# Altium PCB Rcon01.PcbDoc
Units mil, origin at the board's own origin, x right, y up, seen from the top; angles counter-clockwise.
Board outline 4724.41 x 1181.1 mil, 2 copper layers (Top Layer, Bottom Layer); 12 components, 22 nets, 92 pads, 2 vias.
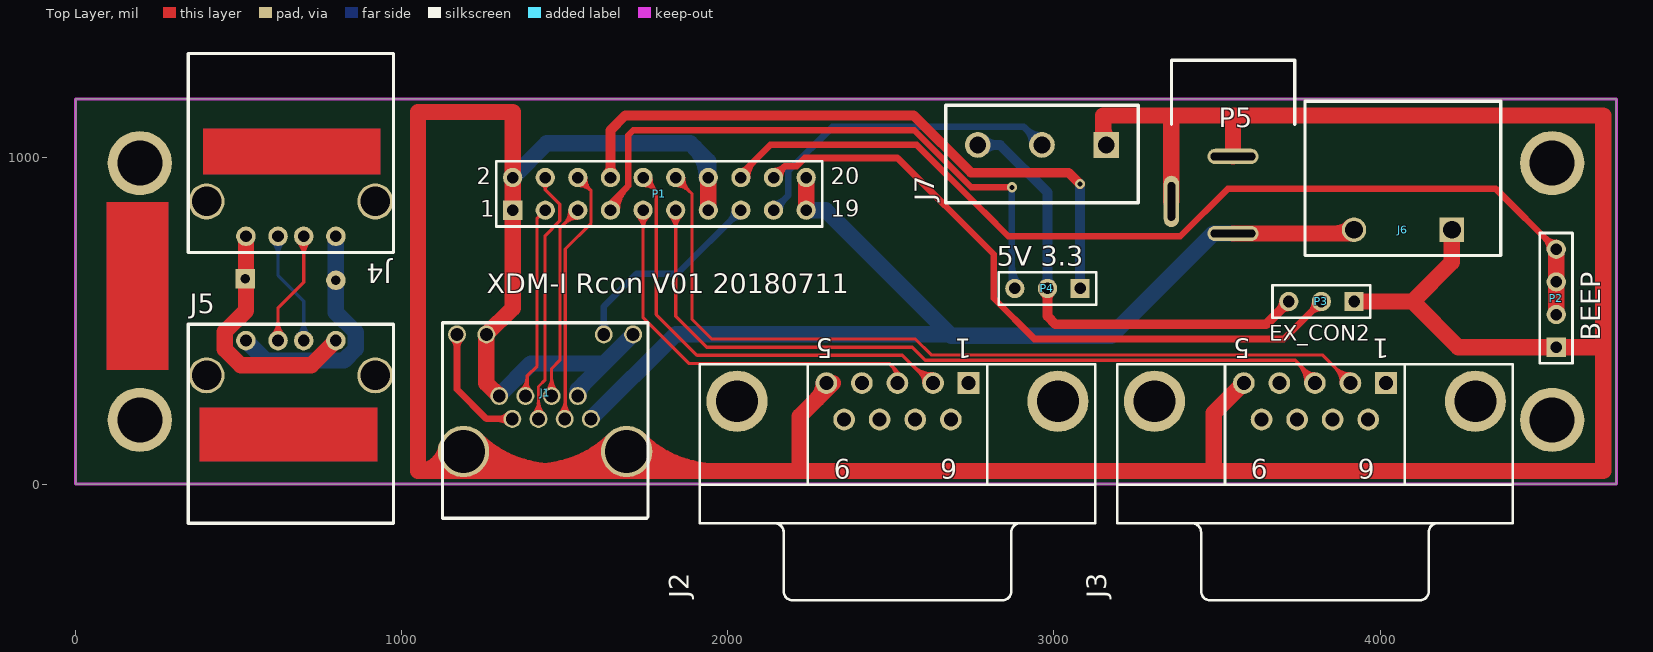
[diagram p0: Top Layer view]
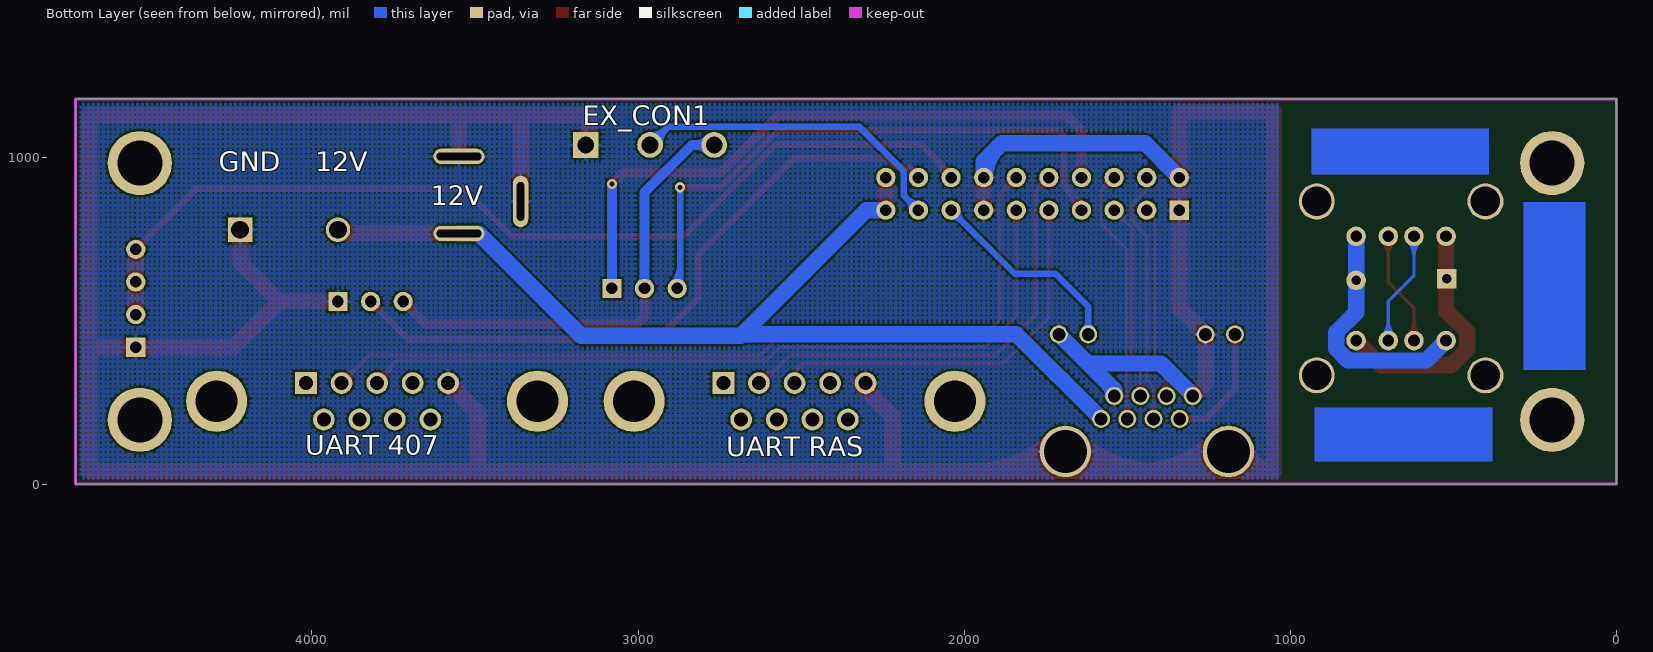
[diagram p1: Bottom Layer view, seen from below]

## Layer stack, top to bottom
Top Layer: signal copper 1.4
Dielectric: dielectric 12.6, FR-4, Dk 4.8
Bottom Layer: signal copper 1.4

## Board outline
0,0 0,1181.1 4724.41,1181.1 4724.41,0

## Design rules (kind name [scope] priority, off if disabled: settings)
Clearance [All] p1: gap=6
Height [All] p1 off: minheight=0 maxheight=1000 prefheight=500
HoleSize [All] p1: absolutevalues=TRUE maxlimit=236.22 minlimit=11.81 maxpercent=80.000 minpercent=20.000
PolygonConnect [All] p1: connectstyle=Relief reliefconductorwidth=10 reliefentries=4 polygonreliefangle="90 Angle"
RoutingVias [All] p1: holewidth=28 width=50 viastyle="Through Hole" minholewidth=11.81 minwidth=23.62 maxholewidth=28 maxwidth=50
SilkscreenOverComponentPads [All] p1: minsilkscreentomaskgap=10
SolderMaskExpansion [All] p1: expansion=4
Width Width_GND [InNet('GND')] p1: maxlimit=50 minlimit=20 preferedwidth=50
Width [All] p2: maxlimit=50 minlimit=10 preferedwidth=10
25 further rules are at their usual default settings.

## Components (designator, comment, footprint, x,y, rotation, side; value= is the part's Value field where it differs from the comment)
J1 "RJ45" RJ45_1 1580,200 r0 top locked
J2 "D Connector 9" DSUB1.385-2H9 2520,-120 r180 top locked
J3 "D Connector 9" DSUB1.385-2H9 3800,-120 r180 top locked
J4 "USB-A" USB-A 660,760 r180 top locked
J5 "USB-A" USB-A 660,440 r0 top locked
J6 "XK7.62-2P" XK7.62-2P 4220,780 r270 top locked
J7 "KF301-3P" KF301-3P 3160,1040 r180 top locked
P1 "Header 10X2" HDR2X10 1340,840 r0 top locked
P2 "Header 4" HDR1X4 4540,420 r90 top
P3 "Header 3" HDR1X3 3920,560 r180 top
P4 "Header 3" HDR1X3 3080,600 r180 top
P5 "Header 3" DC005 3360,1300 r270 top

## Footprints (in the part's own frame and the unit in brackets; to place one, negate y for a bottom-side part, rotate by r counter-clockwise, add the part's x,y. Pads: shape width x height; smd on the part's side, far side on the other; paste and mask are expansions set on the pad)
DC005 [mm]
  oval 1.2x4 hole 0.6 slot 3.5 at 90 deg: 1(13.5,4.8) 3(7.5,4.8)
  oval 4x1.2 hole 0.6 slot 3 at 0 deg: 2(11,0)
  silkscreen extent 0,0 5,9.6
DSUB1.385-2H9 [mm] "Connector; D Subminiature; 9 Position; Right Angle; Pitch 1.385 mm"
  rect 1.69x1.69 hole 1.09: 1(-5.54,-10.92)
  round 1.69 hole 1.09: 2(-2.77,-10.92) 3(0,-10.92) 4(2.77,-10.92) 5(5.54,-10.92) 6(-4.155,-8.08) 7(-1.385,-8.08) 8(1.385,-8.08) 9(4.155,-8.08)
  round 4.76 hole 3.26: 10(-12.495,-9.5) 11(12.495,-9.5)
  silkscreen extent -15.4,-12.4 15.4,6
HDR1X3 [mm] "Connector; Header; 3 Position"
  rect 1.5x1.5 hole 0.9: 1(0,0)
  round 1.5 hole 0.9: 2(2.54,0) 3(5.08,0)
  silkscreen extent -1.27,-1.27 6.35,1.27
HDR1X4 [mm] "Connector; Header; 4 Position"
  rect 1.5x1.5 hole 0.9: 1(0,0)
  round 1.5 hole 0.9: 2(2.54,0) 3(5.08,0) 4(7.62,0)
  silkscreen extent -1.27,-1.27 8.89,1.27
HDR2X10 [mm] "Connector; Header; 10x2 Position"
  rect 1.5x1.5 hole 0.9: 1(0,0)
  round 1.5 hole 0.9: 2(0,2.54) 3(2.54,0) 4(2.54,2.54) 5(5.08,0) 6(5.08,2.54) 7(7.62,0) 8(7.62,2.54) 9(10.16,0) 10(10.16,2.54) 11(12.7,0) 12(12.7,2.54) 13(15.24,0) 14(15.24,2.54) 15(17.78,0) 16(17.78,2.54) 17(20.32,0) 18(20.32,2.54) 19(22.86,0) 20(22.86,2.54)
  silkscreen extent -1.27,-1.27 24.13,3.81
KF301-3P [mm]
  rect 2x2 hole 1.3: 1(0,0)
  round 2 hole 1.3: 2(5,0) 3(10,0)
  silkscreen extent -2.5,-3.1 12.5,4.5
RJ45_1 [mm]
  round 1.4 hole 1: 1(0,0) 2(-1.02,1.78) 3(-2.04,0) 4(-3.06,1.78) 5(-4.08,0) 6(-5.1,1.78) 7(-6.12,0) 8(-7.14,1.78) 9(3.29,6.58) 10(1,6.58) 11(-8.14,6.58) 12(-10.43,6.58)
  round 4 hole 3.35: 13(2.78,-2.54) 14(-9.92,-2.54)
  silkscreen extent -11.56,-7.75 4.44,7.49
USB-A [mm]
  round 1.524 hole 0.92: 1(-3.5,0) 2(-1,0) 3(1,0) 4(3.5,0)
  round 2.8 hole 2.3: 5(-6.57,-2.71) 6(6.57,-2.71)
  silkscreen extent -8,-14.22 8,1.27
XK7.62-2P [mm]
  rect 1.9x1.9 hole 1.4: 1(0,0)
  round 1.9 hole 1.4: 2(0,-7.62)
  silkscreen extent -10,-11.43 2,3.81

## Part data
J1: library part RJ45_1
J2 J3: "Receptacle Assembly, 9 Position, Right Angle"
J4 J5: "USB-A female"
P1: "Header, 10-Pin, Dual row"
P2: "Header, 4-Pin"
P3 P4 P5: "Header, 3-Pin"

## Free pads (board coordinates)
  round 196.85 hole 137.8: 7(196.85,196.85) 8(196.85,984.25) 9(4527.56,196.85) 10(4527.56,984.25)
  rect 60x60 hole 30: 11(520,630)
  round 60 hole 30: 12(797.8,625)

## Via types
v1: diameter 31.5, hole 15.75, Top Layer to Bottom Layer, 2 vias

## Nets (pads, with @x,y where several pads share a name; then routed paths per layer and width w, separated by ;. In a path a pad name is that pad's centre, name@x,y a point inside that pad or via, vN(x,y) a via of type N, cw(c..) or ccw(c..) an arc to the next point about the centre after c; other vN are vias at no path point)
BEEP: P1.16 P2.2 P2.3 P2.4 | length 3295.6
  Top Layer w20: P1.16 2040,950 2130,1040 2579.39,1040 2784.39,835 ; 2785,835 2860,760 3387.43,760 3532.43,905 4355,905 P2.4 ; 4506.66,753.34 ccw(c4540,786.67) 4540,739.53 cw(c4540,786.67) 4506.66,753.34 ; 4506.66,753.34 cw(c4473.33,720) 4520.47,720 ccw(c4473.33,720) 4506.66,753.34 ; P1.16@2040,959.53 ccw(c2040,982.53) 2056.26,966.26 cw(c2040,982.53) P1.16@2040,959.53 ; P1.16@2059.53,940 cw(c2130.81,940) 2080.41,990.41 ccw(c2130.81,940) P1.16@2059.53,940
  Top Layer w50: P2.2 P2.3 P2.4
CON1_N: J1.4 P1.5 | length 1165.8
  Top Layer w10: J1.4 1459.53,354.53 1485,380 1485,785 P1.5 ; 1459.53,300.4 ccw(c1489.85,300.4) 1468.41,278.96 cw(c1489.85,300.4) 1459.53,300.4 ; 1459.53,300.4 cw(c1429.21,300.4) 1450.65,278.96 ccw(c1429.21,300.4) 1459.53,300.4 ; 1459.53,324.54 ccw(c1513.99,324.54) 1475.48,286.03 cw(c1513.99,324.54) 1459.53,324.54 ; 1459.53,324.54 cw(c1405.07,324.54) 1443.58,286.03 ccw(c1405.07,324.54) 1459.53,324.54 ; 1498.13,798.13 ccw(c1456.26,840) 1515.47,840 cw(c1456.26,840) 1498.13,798.13 ; 1498.13,798.13 cw(c1540,756.26) 1540,815.47 ccw(c1540,756.26) 1498.13,798.13 ; 1515.2,815.2 ccw(c1490.4,840) 1525.47,840 cw(c1490.4,840) 1515.2,815.2 ; 1515.2,815.2 cw(c1540,790.4) 1540,825.47 ccw(c1540,790.4) 1515.2,815.2
CON1_P: J1.3 P1.6 | length 1297.8
  Top Layer w10: J1.3 1501,201.31 1501,721 1580.53,800.53 1580.53,899.47 ; P1.6 1580.53,899.47 ; 1564,916 ccw(c1541.1,893.09) 1540.34,925.48 cw(c1541.1,893.09) 1564,916 ; 1564,916 cw(c1586.91,938.9) 1554.52,939.66 ccw(c1586.91,938.9) 1564,916 ; 1580.53,899.47 ccw(c1541.85,860.8) 1540.57,915.48 cw(c1541.85,860.8) 1580.53,899.47 ; 1580.53,899.47 cw(c1619.2,938.15) 1564.52,939.43 ccw(c1619.2,938.15) 1580.53,899.47 ; J1.3@1483.73,215.95 ccw(c1442.05,257.63) 1501,257.63 cw(c1442.05,257.63) J1.3@1483.73,215.95 ; J1.3@1490.81,208.88 ccw(c1466.19,233.49) 1501,233.49 cw(c1466.19,233.49) J1.3@1490.81,208.88 ; 1501,251.29 ccw(c1550.98,251.29) 1515.64,215.95 cw(c1550.98,251.29) 1501,251.29
CON2_N: J1.6 P1.3 | length 820.7
  Top Layer w10: J1.6 1385,275.87 1385,332 ; P1.3 1415,815 1415,362 1385,332 ; 1385,332 cw(c1325.76,332) 1364.47,287.15 ccw(c1325.76,332) 1385,332 ; J1.6@1371.01,279.58 ccw(c1344.62,310.15) 1385,310.15 cw(c1344.62,310.15) J1.6@1371.01,279.58 ; 1385,310.57 ccw(c1419.7,310.57) 1395.16,286.03 cw(c1419.7,310.57) 1385,310.57
CON2_P: J1.5 P1.4 | length 1125.2
  Top Layer w10: J1.5 1419.37,299.37 1439.53,319.53 1439.53,762.16 1484.53,807.16 1484.53,858.44 1440,902.97 ; P1.4 1440,902.97 ; 1419.37,230.32 ccw(c1449.69,230.32) 1428.25,208.88 cw(c1449.69,230.32) 1419.37,230.32 ; 1419.37,230.32 cw(c1389.05,230.32) 1410.49,208.88 ccw(c1389.05,230.32) 1419.37,230.32 ; 1419.37,254.46 ccw(c1473.83,254.46) 1435.32,215.95 cw(c1473.83,254.46) 1419.37,254.46 ; 1419.37,254.46 cw(c1364.91,254.46) 1403.42,215.95 ccw(c1364.91,254.46) 1419.37,254.46 ; 1440,902.97 ccw(c1424.32,902.97) 1430.43,917.42 cw(c1424.32,902.97) 1440,902.97 ; 1440,902.97 cw(c1455.68,902.97) 1449.57,917.42 ccw(c1455.68,902.97) 1440,902.97
EX_CON1: J7.2 P1.17 | length 1181.6
  Bottom Layer w20: P1.17 2185.53,885.53 2185.53,959.39 2185,959.91 2320.46,1095.37 2907.78,1095.37 J7.2 ; P1.17@2140,859.53 ccw(c2140,906.67) 2173.34,873.34 ccw(c2206.67,840) P1.17@2159.53,840 ; J7.2@2933.78,1040 ccw(c2862.87,1040) 2913.01,1090.14 ccw(c2963.15,1140.28) J7.2@2963.15,1069.37
EX_CON2: P1.18 P3.2 | length 2357.7
  Top Layer w20: P1.18 2175,975 2210.61,975 2235.61,1000 2520,1000 2815,705 2815,570 2940,445 3705,445 P3.2 ; 2173.34,973.34 ccw(c2206.67,940) 2159.53,940 cw(c2206.67,940) 2173.34,973.34 ; 2173.34,973.34 cw(c2140,1006.67) 2140,959.53 ccw(c2140,1006.67) 2173.34,973.34 ; 3786.66,526.66 ccw(c3753.33,560) 3800.47,560 cw(c3753.33,560) 3786.66,526.66 ; 3786.66,526.66 cw(c3820,493.33) 3820,540.47 ccw(c3820,493.33) 3786.66,526.66
GND: J1.2 J1.8 J1.9 J1.11 J1.13 J1.14 J2.5 J3.5 J6.1 J7.1 P1.1 P1.2 P1.13 P1.14 P2.1 P3.1 P5.2 P5.3 | length 15794
  Top Layer w50: 1050,44.92 1050,1141.18 1340,1141.18 P1.2 P1.1 1340,539.53 J1.11 1259.53,309.45 J1.8 ; J1.14 1129.37,39.92 ; P1.13 P1.14 ; J2.5@2321.89,309.92 2220,208.03 2220,39.92 ; J7.1@3151.18,1048.82 3151.18,1130 3360,1130 ; P5.2 3360,1130 ; 3490,44.92 3490,218.03 J3.5 ; P5.3 3548.98,1123.98 ; P3.1 4100,560 ; J6.1@4215,785 J6.1 4220,680 4100,560 ; 4679.49,420 P2.1 4240,420 4100,560 ; 1050.01,39.92 ccw(c1050.01,128.51) 1136.8,110.76 cw(c1050.01,128.51) 1050.01,39.92 ; 1050,39.92 1129.37,39.92 ; 1129.37,39.92 2220,39.92 ; 2220,39.92 4684.49,39.92 4684.49,1130 3360,1130 ; 1111.26,39.92 ccw(c1111.26,115.99) 1185.78,100.75 cw(c1111.26,115.99) 1111.26,39.92 ; J1.14@1192.09,102.64 ccw(c1343.52,254.07) 1343.52,39.92 cw(c1343.52,254.07) J1.14@1192.09,102.64 ; J1.14@1227.45,138 ccw(c1464.23,374.78) 1464.23,39.92 cw(c1464.23,374.78) J1.14@1227.45,138 ; 1414.67,39.92 ccw(c1414.67,374.78) 1651.45,138 cw(c1414.67,374.78) 1414.67,39.92 ; 1535.38,39.92 ccw(c1535.38,254.07) 1686.8,102.64 cw(c1535.38,254.07) 1535.38,39.92 ; J1.13@1692.09,102.64 ccw(c1843.52,254.07) 1843.52,39.92 cw(c1843.52,254.07) J1.13@1692.09,102.64 ; J1.13@1727.45,138 ccw(c1964.23,374.78) 1964.23,39.92 cw(c1964.23,374.78) J1.13@1727.45,138 ; 2273.63,261.67 ccw(c2225.38,309.92) 2293.62,309.92 cw(c2225.38,309.92) 2273.63,261.67 ; 3151.18,1095.99 ccw(c3215.99,1095.99) 3170.16,1050.16 cw(c3215.99,1095.99) 3151.18,1095.99
  Bottom Layer w50: J1.8 1298.9,272.58 1396.32,370 1615,370 ; P1.2 1445,1045 1885,1045 1940,990 P1.14 ; J1.2 1539.84,289.37 J1.9 ; J1.2@1542.4,270.08 cw(c1595.15,270.08) 1557.85,307.38 ccw(c1595.15,270.08) J1.2@1542.4,270.08 ; 1896.92,1033.08 cw(c1803.83,940) 1935.47,940 ccw(c1803.83,940) 1896.92,1033.08
LED_FB: J1.7 J1.12 | length 642
  Top Layer w20: J1.12 1169.37,290.63 1260,200 J1.7 ; 1169.37,416.66 ccw(c1126.98,416.66) 1156.95,446.64 cw(c1126.98,416.66) 1169.37,416.66 ; 1169.37,416.66 cw(c1211.76,416.66) 1181.79,446.64 ccw(c1211.76,416.66) 1169.37,416.66 ; 1296.66,200 ccw(c1296.66,242.39) 1326.64,212.42 cw(c1296.66,242.39) 1296.66,200 ; 1296.66,200 cw(c1296.66,157.61) 1326.64,187.58 ccw(c1296.66,157.61) 1296.66,200
LED_ST: J1.10 P1.15 | length 769
  Bottom Layer w20: J1.10@1606.95,471.47 ccw(c1576.98,501.45) 1619.37,501.45 ccw(c1661.76,501.45) J1.10@1631.79,471.47 ; J1.10 1619.37,544.37 1720,645 1845,645 P1.15 ; P1.15@2020.47,840 cw(c1973.33,840) 2006.66,806.66 cw(c2040,773.33) P1.15@2040,820.47
RASPI_RX: J2.3 P1.9 | length 1726.7
  Top Layer w10: P1.9 1740,510 1880,370 2495,370 2540,325 J2.3@2540,309.92 ; 1740,780.79 ccw(c1680.79,780.79) 1722.66,822.66 cw(c1680.79,780.79) 1740,780.79 ; 1740,780.79 cw(c1799.21,780.79) 1757.34,822.66 ccw(c1799.21,780.79) 1740,780.79 ; 1740,804.93 ccw(c1704.93,804.93) 1729.73,829.73 cw(c1704.93,804.93) 1740,804.93 ; 1740,804.93 cw(c1775.07,804.93) 1750.27,829.73 ccw(c1775.07,804.93) 1740,804.93 ; 2500.1,364.9 cw(c2464.29,329.09) 2512.18,312.61 ccw(c2464.29,329.09) 2500.1,364.9 ; 2511.42,353.58 cw(c2481.14,323.29) 2521.64,309.36 ccw(c2481.14,323.29) 2511.42,353.58
RASPI_TX: J2.2 P1.10 | length 2057.9
  Top Layer w10: P1.10 1780.53,899.47 ; J2.2@2649.06,309.92 2620.08,309.92 2535,395 1905,395 1780,520 1780,822.16 1780.53,822.69 1780.53,899.47 ; 1764,916 ccw(c1741.1,893.09) 1740.34,925.48 cw(c1741.1,893.09) 1764,916 ; 1764,916 cw(c1786.91,938.9) 1754.52,939.66 ccw(c1786.91,938.9) 1764,916 ; 1780.53,899.47 ccw(c1741.85,860.8) 1740.57,915.48 cw(c1741.85,860.8) 1780.53,899.47 ; 1780.53,899.47 cw(c1819.2,938.15) 1764.52,939.43 ccw(c1819.2,938.15) 1780.53,899.47 ; 2565.47,364.53 ccw(c2629.06,428.11) 2629.06,338.19 cw(c2629.06,428.11) 2565.47,364.53 ; 2582.54,347.46 ccw(c2629.06,393.97) 2629.06,328.19 cw(c2629.06,393.97) 2582.54,347.46 ; 2587.15,342.85 cw(c2554.22,309.92) 2600.79,309.92 ccw(c2554.22,309.92) 2587.15,342.85 ; 2599.62,330.38 ccw(c2629.06,359.82) 2629.06,318.19 cw(c2629.06,359.82) 2599.62,330.38
ST407_RX: J3.3 P1.11 | length 3063.5
  Top Layer w10: P1.11 1840,515 1935,420 2565,420 2605,380 3740,380 3800,320 J3.3 ; 1840,780.79 ccw(c1780.79,780.79) 1822.66,822.66 cw(c1780.79,780.79) 1840,780.79 ; 1840,780.79 cw(c1899.21,780.79) 1857.34,822.66 ccw(c1899.21,780.79) 1840,780.79 ; 1840,804.93 ccw(c1804.93,804.93) 1829.73,829.73 cw(c1804.93,804.93) 1840,804.93 ; 1840,804.93 cw(c1875.07,804.93) 1850.27,829.73 ccw(c1875.07,804.93) 1840,804.93 ; 3744.62,375.38 cw(c3679.16,309.92) 3771.73,309.92 ccw(c3679.16,309.92) 3744.62,375.38 ; 3761.69,358.31 cw(c3713.3,309.92) 3781.73,309.92 ccw(c3713.3,309.92) 3761.69,358.31 ; 3768.95,351.05 ccw(c3800,382.1) 3800,338.19 cw(c3800,382.1) 3768.95,351.05 ; 3778.76,341.24 cw(c3747.44,309.92) 3791.73,309.92 ccw(c3747.44,309.92) 3778.76,341.24
ST407_TX: J3.2 P1.12 | length 3204.7
  Top Layer w10: P1.12 1890,890 1890,505 1950,445 2575,445 2624,396 3822.98,396 J3.2 ; 1864.8,915.2 ccw(c1840,890.4) 1840,925.47 cw(c1840,890.4) 1864.8,915.2 ; 1864.8,915.2 cw(c1889.6,940) 1854.53,940 ccw(c1889.6,940) 1864.8,915.2 ; 1881.87,898.13 ccw(c1840,856.26) 1840,915.47 cw(c1840,856.26) 1881.87,898.13 ; 1881.87,898.13 cw(c1923.74,940) 1864.53,940 ccw(c1923.74,940) 1881.87,898.13 ; 3860.8,358.18 ccw(c3909.06,406.43) 3909.06,338.19 cw(c3909.06,406.43) 3860.8,358.18 ; 3860.8,358.18 cw(c3812.54,309.92) 3880.79,309.92 ccw(c3812.54,309.92) 3860.8,358.18 ; 3877.87,341.11 ccw(c3909.06,372.29) 3909.06,328.19 cw(c3909.06,372.29) 3877.87,341.11 ; 3877.87,341.11 cw(c3846.69,309.92) 3890.79,309.92 ccw(c3846.69,309.92) 3877.87,341.11
USB_D+: J4.3 J5.3 | length 959.4
  Bottom Layer w10: J4.3 620.63,639.37 699.37,560.63 J5.3 ; 620.63,699.64 ccw(c560.27,699.64) 602.95,742.32 cw(c560.27,699.64) 620.63,699.64 ; 620.63,699.64 cw(c680.99,699.64) 638.31,742.32 ccw(c680.99,699.64) 620.63,699.64 ; 620.63,723.79 ccw(c584.42,723.79) 610.02,749.39 cw(c584.42,723.79) 620.63,723.79 ; 620.63,723.79 cw(c656.84,723.79) 631.24,749.39 ccw(c656.84,723.79) 620.63,723.79 ; 699.37,476.21 ccw(c735.58,476.21) 709.98,450.61 cw(c735.58,476.21) 699.37,476.21 ; 699.37,476.21 cw(c663.16,476.21) 688.76,450.61 ccw(c663.16,476.21) 699.37,476.21 ; 699.37,500.36 ccw(c759.73,500.36) 717.05,457.68 cw(c759.73,500.36) 699.37,500.36 ; 699.37,500.36 cw(c639.01,500.36) 681.69,457.68 ccw(c639.01,500.36) 699.37,500.36
USB_D-: J4.2 J5.2 | length 959.4
  Top Layer w10: J5.2 620.63,540.63 699.37,619.37 J4.2 ; 620.63,476.21 ccw(c656.84,476.21) 631.24,450.61 cw(c656.84,476.21) 620.63,476.21 ; 620.63,476.21 cw(c584.42,476.21) 610.02,450.61 ccw(c584.42,476.21) 620.63,476.21 ; 620.63,500.36 ccw(c680.99,500.36) 638.31,457.68 cw(c680.99,500.36) 620.63,500.36 ; 620.63,500.36 cw(c560.27,500.36) 602.95,457.68 ccw(c560.27,500.36) 620.63,500.36 ; 699.37,699.64 ccw(c639.01,699.64) 681.69,742.32 cw(c639.01,699.64) 699.37,699.64 ; 699.37,699.64 cw(c759.73,699.64) 717.05,742.32 ccw(c759.73,699.64) 699.37,699.64 ; 699.37,723.79 ccw(c663.16,723.79) 688.76,749.39 cw(c663.16,723.79) 699.37,723.79 ; 699.37,723.79 cw(c735.58,723.79) 709.98,749.39 ccw(c735.58,723.79) 699.37,723.79
USB_GND: J4.4 J5.4 pad.11 | length 765.9
  Top Layer w50: J4.4 522.2,531.92 457.2,466.92 457.2,413.08 505.87,364.41 722.2,364.41 J5.4
USB_VCC: J4.1 J5.1 pad.12 | length 747.2
  Bottom Layer w50: J5.1 583.2,379 823.06,379 858.8,414.73 858.8,465.27 797.8,526.27 pad.12 J4.1
V3.3: P1.8 P4.1 | length 2231
  Top Layer w30: P1.8 1640,1085 1685,1130 2570,1130 2745,955 3045,955 v1(3080,920) ; 1640,975.07 ccw(c1675.07,975.07) 1650.27,950.27 cw(c1675.07,975.07) 1640,975.07 ; 1640,975.07 cw(c1604.93,975.07) 1629.73,950.27 ccw(c1604.93,975.07) 1640,975.07
  Bottom Layer w30: P4.1 v1(3080,920) ; 3080,635.07 ccw(c3115.07,635.07) 3090.27,610.27 cw(c3115.07,635.07) 3080,635.07 ; 3080,635.07 cw(c3044.93,635.07) 3069.73,610.27 ccw(c3044.93,635.07) 3080,635.07
V5: P1.7 P4.3 | length 2087.6
  Top Layer w20: P1.7 1640,860 1690.61,910.61 ; 1694.47,915 1694.47,1069.47 1710,1085 2571.16,1085 2746.16,910 v1(2871,910) ; P1.7@1639.53,840 cw(c1686.67,840) 1653.34,873.34 ccw(c1686.67,840) P1.7@1639.53,840 ; P1.7@1659.53,840 cw(c1754.96,840) 1687.48,907.48 ccw(c1754.96,840) P1.7@1659.53,840
  Bottom Layer w20: P4.3@2871,609 v1(2871,910) ; 2871,668.87 ccw(c2948.87,668.87) P4.3@2893.81,613.81
V12: J1.1 J6.2 P1.19 P1.20 P5.1 | length 3374.2
  Top Layer w50: P1.19 P1.20 ; P5.1 J6.2@3908.5,768.5 ; 3862.31,768.5 ccw(c3862.31,837.69) 3911.23,788.77 cw(c3862.31,837.69) 3862.31,768.5
  Bottom Layer w50: J1.1 1840,460 2680,460 ; P1.19 2300,840 2680,460 ; P5.1 3488.5,768.5 3175,455 2685,455 2680,460
VCC: J7.3 P3.3 P4.2 | length 1801
  Top Layer w30: P4.2 2980,515 3005,490 3650,490 P3.3 ; 2980,564.93 ccw(c2944.93,564.93) 2969.73,589.73 cw(c2944.93,564.93) 2980,564.93 ; 2980,564.93 cw(c3015.07,564.93) 2990.27,589.73 ccw(c3015.07,564.93) 2980,564.93 ; 3695.2,535.2 ccw(c3670.4,560) 3705.47,560 cw(c3670.4,560) 3695.2,535.2 ; 3695.2,535.2 cw(c3720,510.4) 3720,545.47 ccw(c3720,510.4) 3695.2,535.2
  Bottom Layer w30: J7.3 2835,1040 2980,895 P4.2 ; J7.3@2783.53,1022.77 cw(c2825.13,981.17) 2825.13,1040 cw(c2825.13,1098.83) J7.3@2783.53,1057.23 ; P4.2@2969.73,610.27 ccw(c2944.93,635.07) 2980,635.07 ccw(c3015.07,635.07) P4.2@2990.27,610.27
pads on no net: J2.1 J2.4 J2.6 J2.7 J2.8 J2.9 J2.10 J2.11 J3.1 J3.4 J3.6 J3.7 J3.8 J3.9 J3.10 J3.11 J4.5 J4.6 J5.5 J5.6

## Polygon pours and split planes (outlines as drawn)
GND on Bottom Layer "Top Layer-No Net" (hatched 90Degree grid 15 track 10, pour order 1000): 1040,1181.1 1040,0 4724.41,0 4724.41,1181.1

## Keep-outs
Keep-Out Layer:
  the board outline again, w9.84

## Other copper
Top Layer:
  rectangle: 380,70 925,235
  rectangle: 95,350 285,865
  rectangle: 390,950 935,1090
Bottom Layer:
  rectangle: 380,70 925,235
  rectangle: 95,350 285,865
  rectangle: 390,950 935,1090

## Silkscreen, mask and mechanical layers (free items; w line width, h text height)
Top Overlay:
  text "5V 3.3" at 2825,670 h60
  text "XDM-I Rcon V01 20180711" at 1260,585 h60
  text "EX_CON2" at 3660,440 h48
  text "BEEP" at 4675,440 h60 r90
Bottom Overlay:
  text "EX_CON1" at 3170,1100 h60
  text "12V" at 3990,960 h60
  text "GND" at 4285,960 h60
  text "12V" at 3635,855 h60
  text "UART 407" at 4020,90 h60
  text "UART RAS" at 2730,85 h60

## Text inside footprints (layer, text, board x,y; h text height)
J2: Top Overlay "6" at 2703.27,75.87 h59.06 r180; Top Overlay "9" at 2376.1,75.87 h59.06 r180; Top Overlay "5" at 2321.57,445.94 h59.06 r180; Top Overlay "1" at 2747.95,445.94 h59.06 r180
J3: Top Overlay "6" at 3983.27,75.87 h59.06 r180; Top Overlay "9" at 3656.1,75.87 h59.06 r180; Top Overlay "5" at 3601.57,445.94 h59.06 r180; Top Overlay "1" at 4027.95,445.94 h59.06 r180
P1: Top Overlay "20" at 2315,920 h50; Top Overlay "19" at 2315,820 h50; Top Overlay "1" at 1240,820 h50; Top Overlay "2" at 1230,920 h50